# EAGLE board LoRaBUG_RGBW_DaughterBoard_01 (EAGLE 8.2.1)
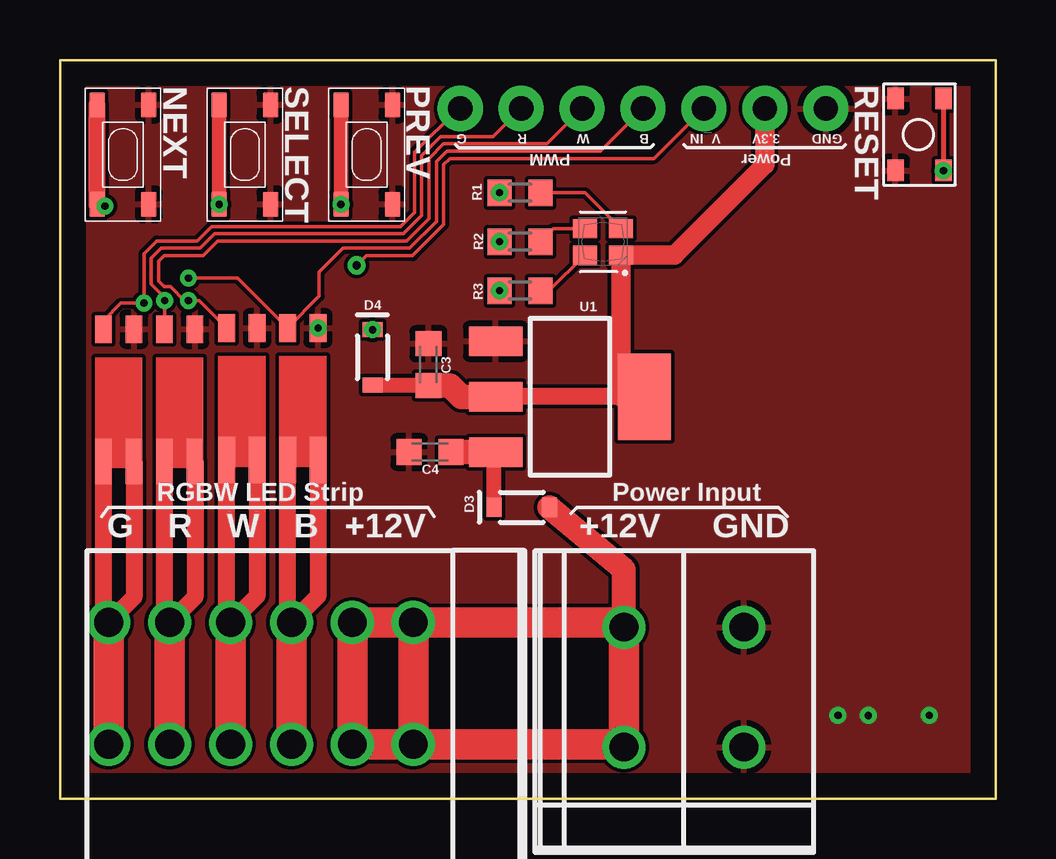
[diagram p0: board, top side]
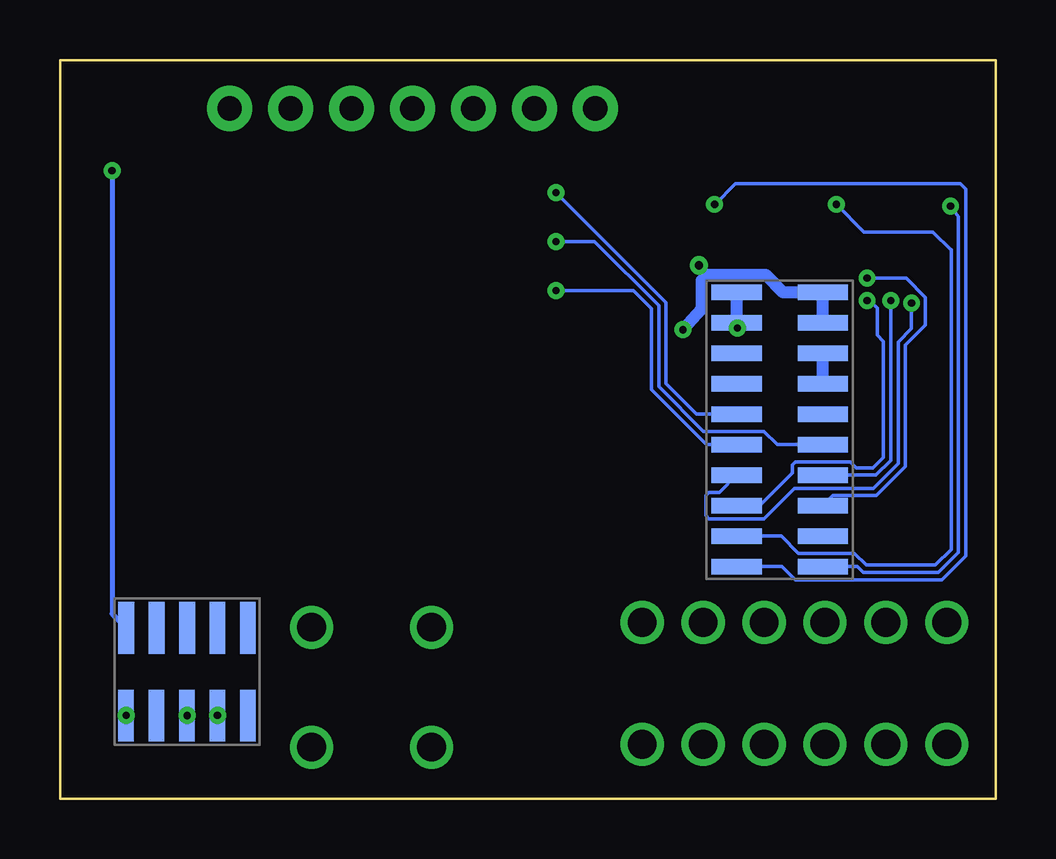
[diagram p1: board, bottom side, seen from below]

Size 39 x 30.8 mm. Coordinates in mm from the lower left corner, seen from the top.
Copper layers (1*16): Top 0.035mm / dielectric 1.5mm / Bottom 0.035mm
Design rules "default *": minimum track width 6mil, minimum drill 0.3mm, track to track 6mil, track to pad 6mil, pad to pad 6mil, via to via 6mil, smd to smd 6mil, copper to edge 40mil, drill to drill 6mil, minimum pad ring 10mil, minimum via ring 8mil, stop-mask expansion 4mil, vias tented up to drill 0mil, thermal gap 10mil

## Footprints (pad centres in the part's own frame; a part is rotated, then mirrored left to right if it is on the bottom)
TACTILE_SWITCH_SMD_3.3X3.1MM_LS38 = smd 0.9 x 0.7: P$1 0,0; P$2 3,0; P$3 0,-2; P$4 3,-2
LFPAK56D = smd 0.7 x 1.15: P$1 -1.905,-3.275; P$2 -0.635,-3.275; P$3 0.635,-3.275; P$4 1.905,-3.275 | smd 0.7 x 1.9: P$5 1.905,2.225; P$6 0.635,2.225; P$7 -0.635,2.225; P$8 -1.905,2.225
C0603K = smd 1.05 x 1.08: 1 -0.875,0; 2 0.875,0
SOD-323 = smd 0.63 x 0.83: A 1.15,0; C -1.15,0
1X07_NO_SILK = drill 1.016 pad 1.88: 1 0,0; 2 2.54,0; 3 5.08,0; 4 7.62,0; 5 10.16,0; 6 12.7,0; 7 15.24,0
TACTILE_SWITCH_SMD_4.2X3.2MM = smd 1.05 x 0.65: P$1 -2.1,1.05; P$2 2.05,1.05; P$3 -2.1,-1.1; P$4 2.05,-1.1
R0603 = smd 1 x 1.1: 1 -0.85,0; 2 0.85,0
SOT223 = smd 1.219 x 2.235: 1 -2.311,-3.099; 2 0,-3.099; 3 2.311,-3.099 | smd 3.6 x 2.2: 4 0,3.099
CONN_1X2_AMP-TE-2834095-1 = drill 1.194: P1@1 0,-5; P1@2 0,0; P2@1 5,-5; P2@2 5,0
LORABUG_MODULE = smd 0.65 x 2.15 bottom: D1 22.165,-11.925; D2 22.16,-8.275; D3 23.435,-11.925; D4 23.43,-8.275; D5 24.705,-11.925; D6 24.7,-8.275; D7 25.975,-11.925; D8 25.97,-8.275; D9 27.245,-11.925; D10 27.24,-8.275 | smd 2.1 x 0.65 bottom: H1 -1.802,5.712; H2 1.798,5.712; H3 -1.802,4.442; H4 1.798,4.442; H5 -1.802,3.172; H6 1.798,3.172; H7 -1.802,1.902; H8 1.798,1.902; H9 -1.802,0.632; H10 1.798,0.632; H11 -1.802,-0.638; H12 1.798,-0.638; H13 -1.802,-1.908; H14 1.798,-1.908; H15 -1.802,-3.178; H16 1.798,-3.178; H17 -1.802,-4.448; H18 1.798,-4.448; H19 -1.802,-5.718; H20 1.798,-5.718
CONN_1X6_AMP-TE-1-2834016-6 = drill 1.2: P$1 0,0; P$2 0,-5.08; P$3 2.54,0; P$4 2.54,-5.08; P$5 5.08,0; P$6 5.08,-5.08; P$7 7.62,0; P$8 7.62,-5.08; P$9 10.16,0; P$10 10.16,-5.08; P$11 12.7,0; P$12 12.7,-5.08
PLCC4-2MM-RGB = smd 1 x 0.8: BLUE -0.75,-0.55; CA 0.75,-0.55; GREEN -0.75,0.55; RED 0.75,0.55

## Placement (x,y rotation side)
!RESET  MOMENTARY-SWITCH-SPST-LS38  [TACTILE_SWITCH_SMD_3.3X3.1MM_LS38]  34.83,26.19 90 top
BUK9K5R1-30EX1  N-MOSFET-DUAL-BUK9K5R1-30EX  [LFPAK56D]  3.72,16.3 180 top
BUK9K5R1-30EX2  N-MOSFET-DUAL-BUK9K5R1-30EX  [LFPAK56D]  8.85,16.35 180 top
C3  10uF  [C0603K]  15.36,18.1 90 top
C4  10uF  [C0603K]  15.42,14.46 180 top
D3  500mA/30V  [SOD-323]  19.25,12.15 0 top
D4  500mA/30V  [SOD-323]  13.03,18.4 270 top
J1  [1X07_NO_SILK]  16.69,28.78 0 top
NEXT  MOMENTARY-SWITCH-SPST-PTS810  [TACTILE_SWITCH_SMD_4.2X3.2MM]  2.65,26.83 270 top
PREV  MOMENTARY-SWITCH-SPST-PTS810  [TACTILE_SWITCH_SMD_4.2X3.2MM]  12.81,26.83 270 top
R1  475Ω  [R0603]  19.17,25.27 180 top
R2  475Ω  [R0603]  19.17,23.22 180 top
R3  475Ω  [R0603]  19.17,21.18 180 top
SELECT  MOMENTARY-SWITCH-SPST-PTS810  [TACTILE_SWITCH_SMD_4.2X3.2MM]  7.73,26.83 270 top
U1  V_REG_RT9164A  [SOT223]  21.26,16.76 270 top
U$3  CONN_1X2_AMP-TE-2834095-1  [CONN_1X2_AMP-TE-2834095-1]  23.51,7.15 0 top
U$4  LORABUG_MODULE  [LORABUG_MODULE]  9,15.4 0 top
U$12  CONN_1X6_AMP-TE-1-2834016-6  [CONN_1X6_AMP-TE-1-2834016-6]  2.03,7.35 0 top
U$14  LED-RGB-CLMVB-FKARGB  [PLCC4-2MM-RGB]  22.63,23.22 0 top

## Library data of the parts
!RESET BUK9K5R1-30EX1 BUK9K5R1-30EX2 NEXT PREV SELECT U1 U$3 U$4 U$12 U$14 = LoRaBUG_RGBW_Board
C3 C4 R1-R3 = resistor
D3 D4 = LoRaBUG_RGBW_Board; PROD_ID: NSR0530HT1GOSCT-ND
J1 = SparkFun-Connectors

## Nets
!RESET: !RESET.P$3 !RESET.P$4 U$4.D10
B_LED: R3.2 U$4.H12
B_MOSFET: BUK9K5R1-30EX2.P$2 J1.4 U$4.H15
B_TERMINAL: BUK9K5R1-30EX2.P$7 BUK9K5R1-30EX2.P$8 U$12.P$7 U$12.P$8
G_LED: R2.2 U$4.H11
G_MOSFET: BUK9K5R1-30EX1.P$4 J1.1 U$4.H14
G_TERMINAL: BUK9K5R1-30EX1.P$5 BUK9K5R1-30EX1.P$6 U$12.P$1 U$12.P$2
GND: !RESET.P$1 !RESET.P$2 BUK9K5R1-30EX1.P$1 BUK9K5R1-30EX1.P$3 BUK9K5R1-30EX2.P$1 BUK9K5R1-30EX2.P$3 C3.2 C4.2 J1.7 NEXT.P$1 NEXT.P$2 PREV.P$1 PREV.P$2 SELECT.P$1 SELECT.P$2 U1.1 U$3.P2@1 U$3.P2@2 U$4.D3 U$4.D5 U$4.D9 U$4.H2 U$4.H4
N$1: R1.1 U$14.RED
N$2: R2.1 U$14.GREEN
N$3: R3.1 U$14.BLUE
N_VIN: C4.1 D3.C U1.3
R_LED: R1.2 U$4.H10
R_MOSFET: BUK9K5R1-30EX1.P$2 J1.2 U$4.H13
R_TERMINAL: BUK9K5R1-30EX1.P$7 BUK9K5R1-30EX1.P$8 U$12.P$3 U$12.P$4
SWITCH_NEXT: NEXT.P$3 NEXT.P$4 U$4.H19
SWITCH_PREV: PREV.P$3 PREV.P$4 U$4.H20
SWITCH_SELECT: SELECT.P$3 SELECT.P$4 U$4.H18
V_IN: D4.C J1.5 U$4.H1 U$4.H3
VCC_3V3: C3.1 D4.A J1.6 U1.2 U1.4 U$14.CA
VCC_12V: D3.A U$3.P1@1 U$3.P1@2 U$12.P$9 U$12.P$10 U$12.P$11 U$12.P$12
VCC_NREG: U$4.H5 U$4.H7
VDDS: U$4.D1
W_MOSFET: BUK9K5R1-30EX2.P$4 J1.3 U$4.H16
W_TERMINAL: BUK9K5R1-30EX2.P$5 BUK9K5R1-30EX2.P$6 U$12.P$5 U$12.P$6

## Tracks (layer width: path | path; a pad name or v marks a point on that pad's centre or on a via)
!RESET  (via drill 0.3)
  Top 0.2: !RESET.P$4 !RESET.P$3
  Bottom 0.2: !RESET.P$3 36.83,7.72 U$4.D10
  other vias: 36.83,26.19
B_LED  (via drill 0.3)
  Bottom 0.152: 13.76,16.47 | 13.76,16.47 12.33,15.04 12.33,15.03 12.06,14.77 U$4.H12 | 13.76,16.47 14.35,17.06 14.35,20.43 15.1,21.18 R3.2
  other vias: 18.32,21.18
B_MOSFET  (via drill 0.3)
  Top 0.152: v5.36,21.7 7.41,21.7 BUK9K5R1-30EX2.P$2 10.81,20.95 10.81,21.95 11.81,22.95 14.57,22.95 15.69,24.07 15.69,26.57 16.12,27 21.47,27 | 21.64,27 21.47,27 | 21.47,27 22.53,27 J1.4
  Bottom 0.152: U$4.H15 6.79,12.63 4.98,12.63 3.76,13.86 3.76,18.91 2.92,19.75 2.92,20.9 3.72,21.7 v5.36,21.7
B_TERMINAL
  Top 0.61: BUK9K5R1-30EX2.P$7 BUK9K5R1-30EX2.P$8
  Top 0.7: BUK9K5R1-30EX2.P$7 9.49,7.52 U$12.P$7
  Top 0.711: BUK9K5R1-30EX2.P$8 10.76,8.46 U$12.P$7
  Top 1.27: U$12.P$7 U$12.P$8
G_LED  (via drill 0.3)
  Bottom 0.152: U$4.H11 9.1,14.76 9.65,15.32 12.18,15.32 14.04,17.18 14.04,20.55 16.71,23.22 R2.2
  other vias: 18.32,23.22
G_MOSFET  (via drill 0.3)
  Top 0.152: BUK9K5R1-30EX1.P$4 1.82,19.94 2.54,20.66 v3.5,20.66 3.5,22.72 4.03,23.25 5.71,23.25 6.32,23.86 14.19,23.86 14.78,24.45 14.78,26.95 16.61,28.78 J1.1
  Bottom 0.152: 9.88,13.32 10.63,13.32 U$4.H14 11.51,12.78 11.94,12.78 12.08,12.64 12.08,11.8 11.94,11.67 9.65,11.67 8.38,12.94 5.1,12.94 4.06,13.98 4.06,19.04 3.5,19.59 v3.5,20.66
G_TERMINAL
  Top 0.61: BUK9K5R1-30EX1.P$5 BUK9K5R1-30EX1.P$6
  Top 0.7: BUK9K5R1-30EX1.P$5 1.82,7.57 U$12.P$1
  Top 0.711: BUK9K5R1-30EX1.P$6 3.09,8.41 U$12.P$1
  Top 1.27: U$12.P$1 U$12.P$2
GND  (via drill 0.3)
  Bottom 0.152: U$4.H4 10.8,19.67 BUK9K5R1-30EX2.P$1
  Bottom 0.2: U$4.D5
  Bottom 0.508: U$4.H2 U$4.H4
  other vias: 36.24,3.48 33.7,3.47 32.44,3.48 10.76,19.62
  pour Top (isolate 0.152): 0.07,30.74 38.95,30.74 38.95,30.74 38.95,0.06 38.95,0.05 0.06,0.05 0.05,0.06 0.05,30.74 0.06,30.75 0.07,30.75
N$1
  Top 0.152: R1.1 21.89,25.27 U$14.RED
N$2
  Top 0.152: U$14.GREEN 20.57,23.77 R2.1
N$3
  Top 0.152: R3.1 20.4,21.18 U$14.BLUE
N_VIN
  Top 0.635: D3.C 18.1,14.39 U1.3
  Top 1.016: U1.3 C4.1
R_LED  (via drill 0.3)
  Bottom 0.152: U$4.H10 12.46,16.03 13.74,17.31 13.74,20.14 | 13.74,20.14 13.74,20.22 | 13.74,20.14 13.74,20.68 R1.2
  other vias: 18.32,25.27
R_MOSFET  (via drill 0.3)
  Top 0.152: 4.36,19.58 BUK9K5R1-30EX1.P$2 v4.36,20.75 v4.36,20.76 4.36,20.89 3.81,21.45 3.81,22.54 4.21,22.95 5.84,22.95 6.45,23.56 14.32,23.56 15.08,24.32 15.08,26.82 15.87,27.61 18.06,27.61 J1.2
  Bottom 0.152: U$4.H13 4.98,13.49 4.36,14.11 v4.36,20.76
R_TERMINAL
  Top 0.61: BUK9K5R1-30EX1.P$7 BUK9K5R1-30EX1.P$8
  Top 0.7: BUK9K5R1-30EX1.P$7 4.36,7.57 U$12.P$3
  Top 0.711: BUK9K5R1-30EX1.P$8 5.63,8.41 U$12.P$3
  Top 1.27: U$12.P$3 U$12.P$4
SWITCH_NEXT  (via drill 0.3)
  Top 0.152: v1.88,24.71 NEXT.P$4
  Top 0.7: NEXT.P$4 NEXT.P$3
  Bottom 0.152: U$4.H19 5.76,9.68 5.51,9.43 2.38,9.43 1.55,10.27 1.55,22.82 1.55,23.4 1.55,24.28 v1.88,24.71
SWITCH_PREV  (via drill 0.3)
  Top 0.61: PREV.P$3 PREV.P$4
  Bottom 0.152: PREV.P$4 11.71,24.75 PREV.P$4 | PREV.P$4 | U$4.H20 8.9,9.68 8.34,9.13 2.23,9.13 1.24,10.12 1.24,25.41 1.47,25.64 10.84,25.64 PREV.P$4
  other vias: 11.71,24.78
SWITCH_SELECT  (via drill 0.3)
  Top 0.61: SELECT.P$4 SELECT.P$3
  Bottom 0.152: U$4.H18 8.93,10.95 8.21,10.24 5.88,10.24 5.38,9.74 2.51,9.74 1.85,10.4 1.85,22.87 | 1.85,22.87 1.85,22.9 | 1.85,22.87 2.61,23.63 5.05,23.63 | 5.05,23.63 5.48,23.63 | 5.05,23.63 5.48,23.63 | 5.48,23.63 SELECT.P$4
  other vias: 6.63,24.78
V_IN  (via drill 0.3, 0.35)
  Top 0.152: v12.37,22.24 12.77,22.64 14.7,22.64 16,23.94 16,26.44 16.25,26.7 24.76,26.7 J1.5
  Bottom 0.152: v12.37,22.24 12.37,22.19 12.02,21.84
  Bottom 0.508: U$4.H3 U$4.H1 8.85,21.11 9.58,21.84 12.02,21.84 12.25,21.61 12.25,20.41 D4.C
  other vias: 13.03,19.55
VCC_3V3
  Top 0.635: D4.A 15.32,17.25 C3.1
  Top 0.7: U1.2 23.36,16.76 U1.4
  Top 0.813: 23.36,16.76 23.38,16.79 U$14.CA 25.62,22.67 29.38,26.43 29.38,28.77 J1.6
  Top 1.016: C3.1 16.26,17.22 16.73,16.75 U1.2
VCC_12V
  Top 1: U$3.P1@2 23.51,9.55 D3.A
  Top 1.27: U$12.P$12 U$12.P$10 U$12.P$9 U$12.P$11 | U$12.P$11 U$12.P$12 | 23.39,2.27 U$12.P$12 | 23.39,2.27 U$3.P1@1 | U$12.P$11 23.31,7.35 U$3.P1@2 23.51,2.39 23.39,2.27
VCC_NREG
  Bottom 0.508: U$4.H7 U$4.H5
W_MOSFET  (via drill 0.3)
  Top 0.152: BUK9K5R1-30EX2.P$4 5.81,20.76 v5.36,20.76 5.19,20.76 4.61,21.34 4.34,21.34 4.11,21.57 4.11,22.41 4.34,22.64 5.96,22.64 6.57,23.25 14.45,23.25 15.39,24.19 15.39,26.69 16,27.3 20.29,27.3 J1.3
  Bottom 0.152: U$4.H16 9.83,12.22 8.48,13.58 8.48,13.91 8.34,14.05 6.05,14.05 5.81,13.8 5.11,13.8 4.67,14.23 4.67,19.07 4.94,19.33 4.94,20.45 5.18,20.69 5.28,20.69 v5.36,20.76
W_TERMINAL
  Top 0.61: BUK9K5R1-30EX2.P$5 BUK9K5R1-30EX2.P$6
  Top 0.7: BUK9K5R1-30EX2.P$5 6.95,7.52 U$12.P$5
  Top 0.711: BUK9K5R1-30EX2.P$6 8.21,8.46 U$12.P$5
  Top 1.27: U$12.P$5 U$12.P$6

## Text on the board
tPlace: G | R | W | B | V_IN | 3.3V | GND | PWM | Power | RESET | RGBW LED Strip | Power Input | G | R | W | B | +12V | +12V | GND